# Altium PCB pannello.PcbDoc
Units mm, origin at the board's own origin, x right, y up, seen from the top; angles counter-clockwise.
Board outline 248.57 x 99 mm, 2 copper layers (Top Layer, Bottom Layer), stack 1.57 mm thick; 6 components, 0 nets, 10 pads, 0 vias.
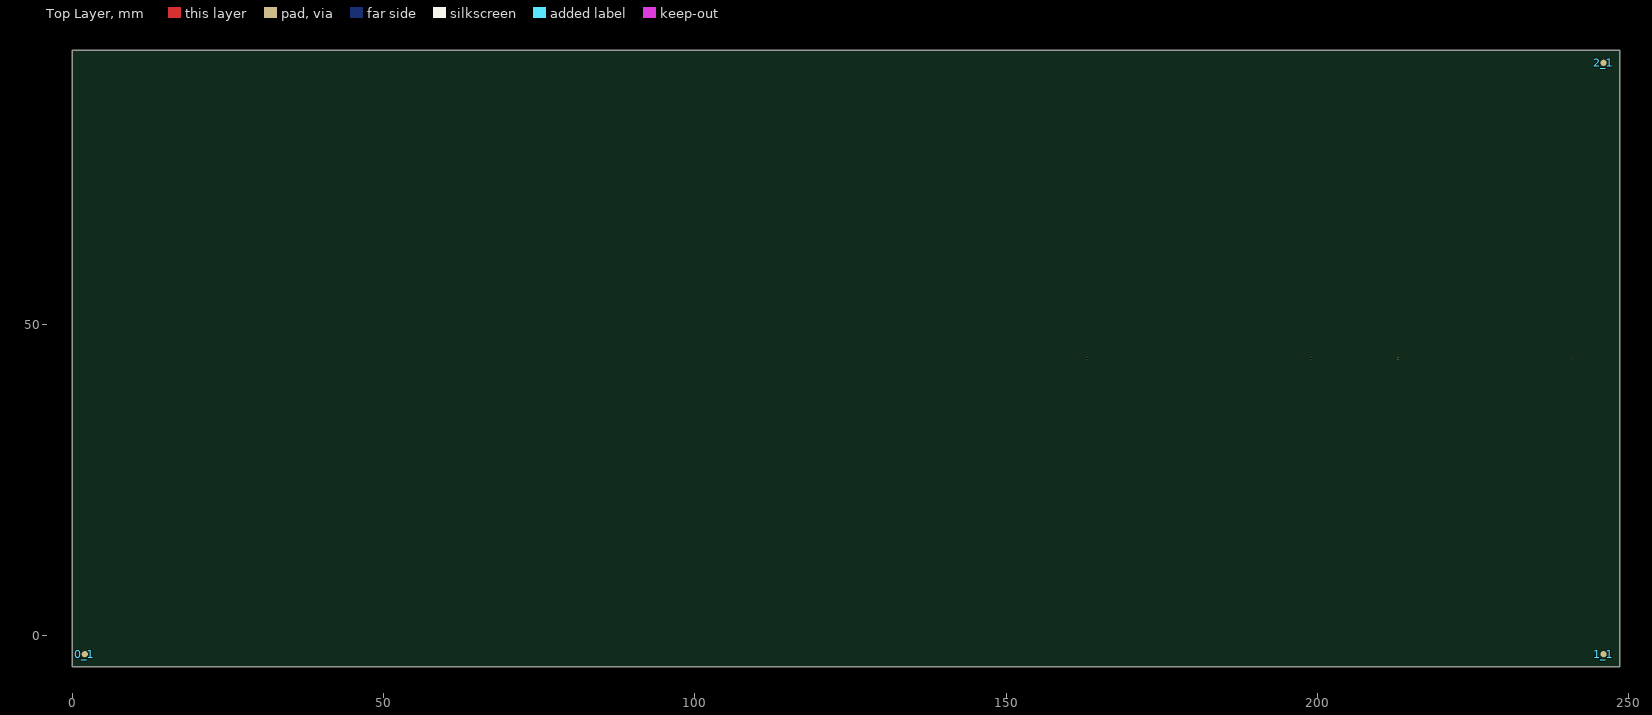
[diagram p0: Top Layer view]
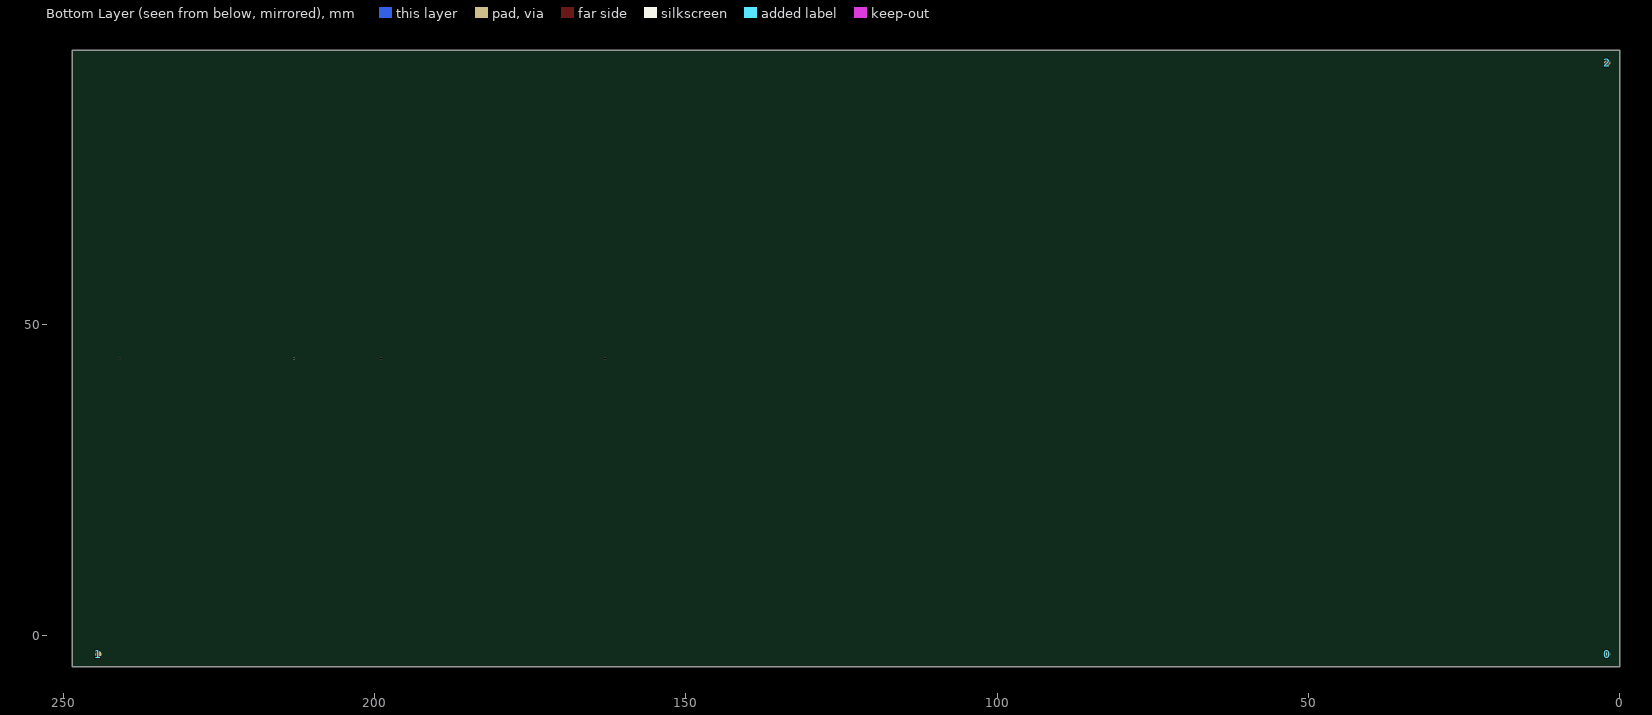
[diagram p1: Bottom Layer view, seen from below]

## Layer stack, top to bottom
Top Solder: solder mask 0.0102, Solder Resist, Dk 3.5
Top Layer: signal copper 0.035
Dielectric1: core 1.5, FR-4, Dk 4.2
Bottom Layer: signal copper 0.035
Bottom Solder: solder mask 0.0102, Solder Resist, Dk 3.5

## Board outline
0,-5 0,94 248.575,94 248.575,-5

## Design rules (kind name [scope] priority, off if disabled: settings)
Clearance [All] p1: gap=0.25
ComponentClearance [All] p1: gap=0.25 collisioncheckmode=3 verticalgap=0.25 showdistances=FALSE
HoleSize [All] p1: absolutevalues=TRUE maxlimit=10 minlimit=0.2 maxpercent=80.000 minpercent=20.000
HoleToHoleClearance [All] p1: gap=0.25 allowstackedmicrovias=TRUE
MinimumSolderMaskSliver [All] p1: minsoldermaskwidth=0.15
PlaneClearance [All] p1: clearance=0.5
PlaneConnect PlaneConnect_via [isvia] p1: planeconnectstyle=Direct reliefexpansion=0.508 reliefentries=4 reliefconductorwidth=0.254 reliefairgap=0.254
PlaneConnect [All] p2: planeconnectstyle=Relief reliefexpansion=0.6 reliefentries=4 reliefconductorwidth=0.35 reliefairgap=0.35
PolygonConnect PolygonConnect_via [isvia] p1: connectstyle=Direct reliefconductorwidth=0.254 reliefentries=4 polygonreliefangle="90 Angle" airgapwidth=0.254
PolygonConnect [All] p2: connectstyle=Relief reliefconductorwidth=0.35 reliefentries=4 polygonreliefangle="90 Angle" airgapwidth=0.6
RoutingVias [All] p1: holewidth=0.3 width=0.6 viastyle="Through Hole" minholewidth=0.2 minwidth=0.35 maxholewidth=0.5 maxwidth=1
SilkToSilkClearance [All] p1: silktosilkclearance=0.1
SilkToSolderMaskClearance [IsPad] p1: minsilkscreentomaskgap=0.15 clearancetoexposedcopper=TRUE
SolderMaskExpansion SolderMaskExpansion_via [isVia] p1: expansion=-10
SolderMaskExpansion [All] p2: expansion=0.05
Width [All] p1: maxlimit=5 minlimit=0.15 preferedwidth=0.25
22 further rules are at their usual default settings.

## Components (designator, comment, footprint, x,y, rotation, side; value= is the part's Value field where it differs from the comment)
0 "0" Fiducial_mark_nosilk 2,-3 r180 bottom
0_1 "0" Fiducial_mark_nosilk 2,-3 r0 top
1 "0" Fiducial_mark_nosilk 244.4,-3 r180 bottom
1_1 "0" Fiducial_mark_nosilk 246,-3 r0 top
2 "0" Fiducial_mark_nosilk 2,92 r180 bottom
2_1 "0" Fiducial_mark_nosilk 246,92 r0 top

## Footprints (in the part's own frame and the unit in brackets; to place one, negate y for a bottom-side part, rotate by r counter-clockwise, add the part's x,y. Pads: shape width x height; smd on the part's side, far side on the other; paste and mask are expansions set on the pad)
Fiducial_mark_nosilk [mm]
  round 1 smd mask+1: "Fiducial Mark"(0,0)
  Top Layer pour cut-out: 0,-1.6 -0.612,-1.478 -1.131,-1.131 -1.478,-0.612 -1.6,0 -1.6,0 -1.478,0.612 -1.131,1.131 -0.612,1.478 0,1.6 0,1.6 0.612,1.478 1.131,1.131 1.478,0.612 1.6,0 1.6,0 1.478,-0.612 1.131,-1.131 0.612,-1.478 0,-1.6

## Free pads (board coordinates)
  round 0.3 hole 0.3: 0(163,44.5) 1(199,44.5) 2(213,44.5) 3(241,44.5)

## Nets (pads, with @x,y where several pads share a name; then routed paths per layer and width w, separated by ;. In a path a pad name is that pad's centre, name@x,y a point inside that pad or via, vN(x,y) a via of type N, cw(c..) or ccw(c..) an arc to the next point about the centre after c; other vN are vias at no path point)
pads on no net: "0.Fiducial Mark" "0_1.Fiducial Mark" "1.Fiducial Mark" "1_1.Fiducial Mark" "2.Fiducial Mark" "2_1.Fiducial Mark"

## Silkscreen, mask and mechanical layers (free items; w line width, h text height)
Outline:
  the board outline again, w0.2
Drawing:
  circle w0.127: c0,0 r3
  circle w0.127: c0,0 r1.55
  lines w0.127: -4,0 4,0 ; 0,-4 0,4
  text "Mechanical Characteristics" at 7,-11.6 h5
Assembly_top:
  text "Assembly TOP" at 6.928,-11.761 h5
Assembly_bot:
  text "Assembly Bottom" at 43.928,-11.761 h5
Note_top:
  text "Note TOP" at 6.928,-11.761 h5
Note_bot:
  text "Note Bottom" at 43.828,-11.661 h5
PCB_Note:
  lines w0.2: -7.7,-0.1 -2,-0.1 -2,-1.225 -0.5,-0.1 -2,1.025 -2,-0.101 255.101,-0.101 ; -7.7,89.1 -2,89.1 ; 251.5,-0.1 251.5,-1.226 250,-0.101 251.5,1.024 251.5,-0.101 257.2,-0.101 ; 251.5,89.1 251.5,87.974 250,89.099 251.5,90.224 251.5,89.099 257.2,89.099 ; 255.101,89.099 -2,89.099 ; -2,89.1 -2,87.975 -0.5,89.1 -2,90.225 -2,89.099
  lines w0.3: 150.1,89 150.125,-0.101 ; 206.325,89 206.35,0
  lines w1: 150.575,44.5 162,44.5 ; 164,44.5 198,44.5 ; 200,44.5 212,44.5 ; 214,44.5 240,44.5 ; 242,44.5 250.525,44.5
  text "V-CUT" at 208,97 h6 r90
  text "V-CUT" at 152,96.5 h6 r90
  text "PCB Note" at 1,96 h5
  text "V-CUT" at -23,87.5 h6
  text "V-CUT" at 257.8,87.4 h6
  text "V-CUT" at -23,-1.7 h6
  text "V-CUT" at 257.8,-1.8 h6
  text "V-CUT" at 208,-23 h6 r90
  text "V-CUT" at 151,-23.5 h6 r90

## Panel: embedded boards
"input.PcbDoc" at 206.475,45, 1 rows x 1 columns, spacing 63.5 x 38.1, rotation 0
"output.PcbDoc" at 150.25,45, 1 rows x 1 columns, spacing 63.5 x 38.1, rotation 0
"output.PcbDoc" at 150.2,0, 1 rows x 1 columns, spacing 63.5 x 38.1, rotation 0
"input.PcbDoc" at 206.5,0, 1 rows x 1 columns, spacing 63.5 x 38.1, rotation 0
"power_interface.PcbDoc" at 0,0, 1 rows x 1 columns, spacing 63.5 x 38.1, rotation 0